# EAGLE board eagleBoard (EAGLE 7.5.0)
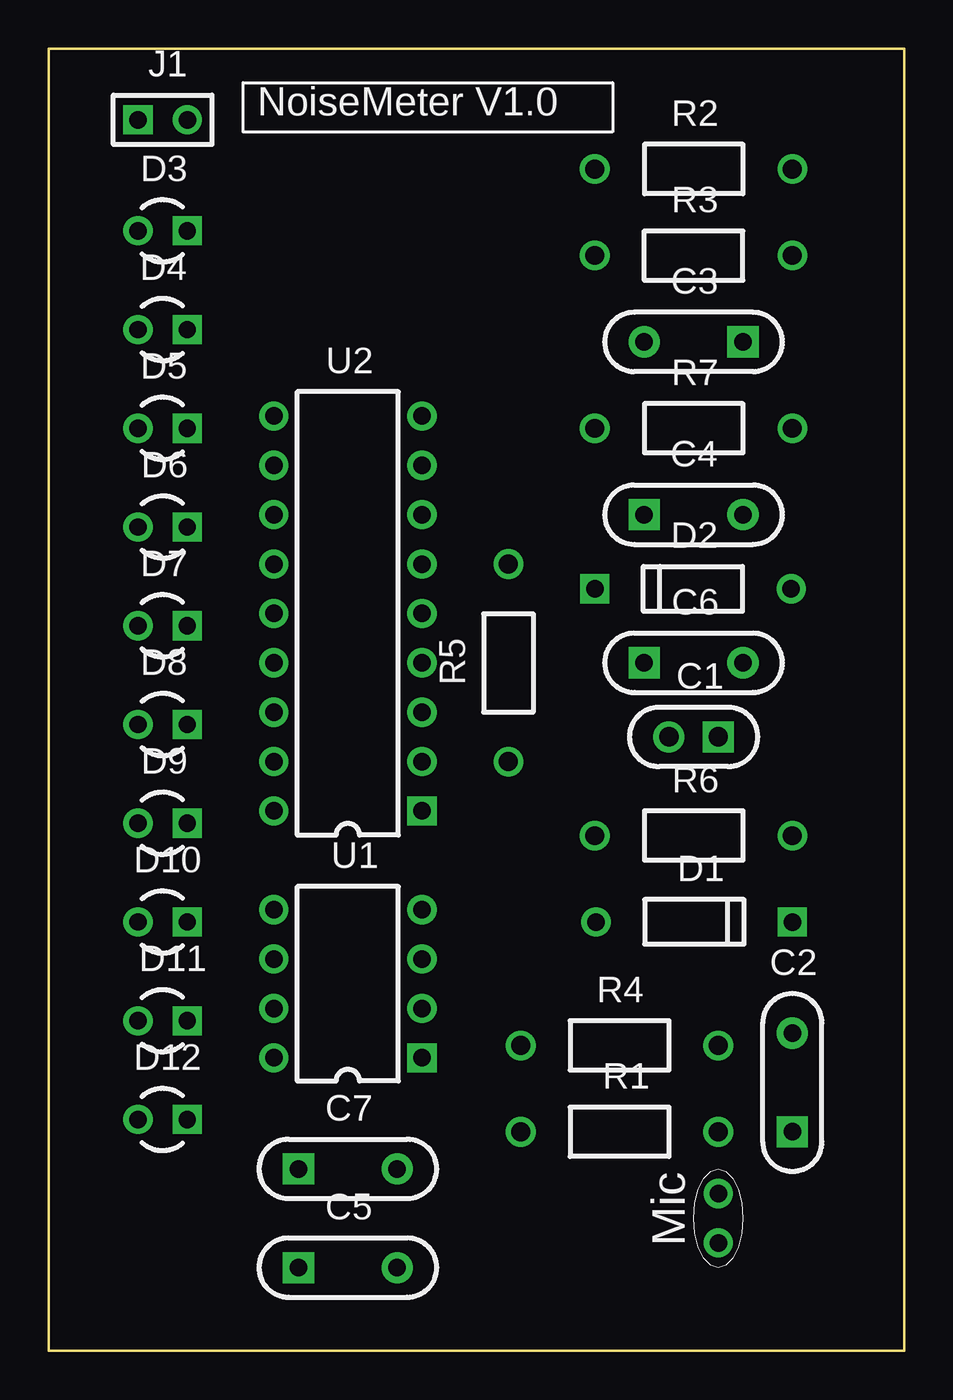
[diagram p0: board, top side]
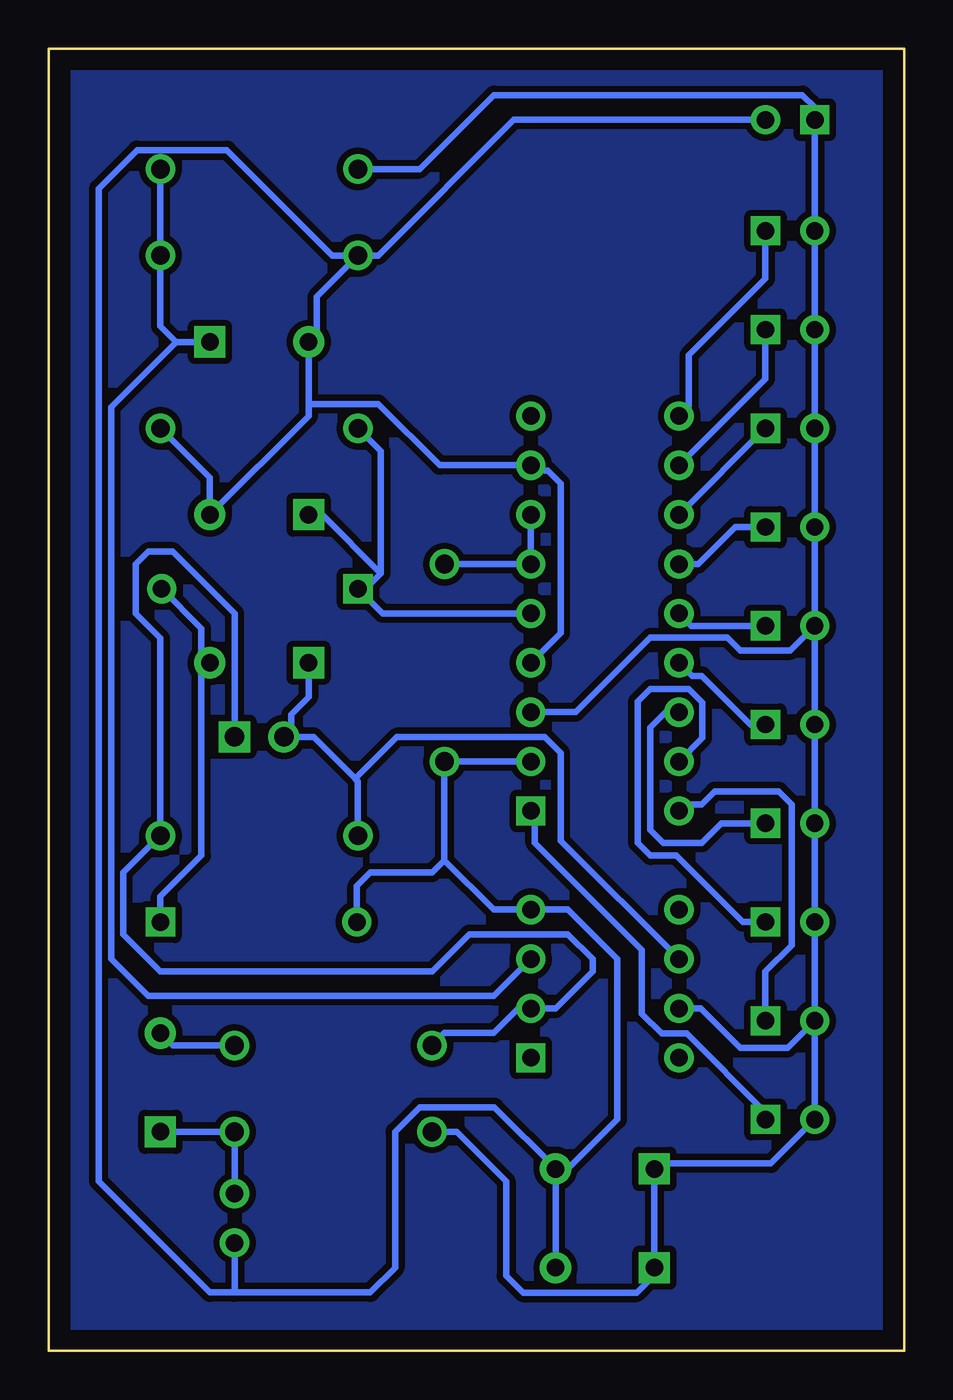
[diagram p1: board, bottom side, seen from below]

Size 44 x 67 mm. Coordinates in mm from the lower left corner, seen from the top.
Outline: 0,67 44,67 44,0 0,0 0,67
Copper layers (1*16): Top 0.035mm / dielectric 1.5mm / Bottom 0.035mm
Design rules "default *": minimum track width 10mil, minimum drill 0.61mm, track to track 8mil, track to pad 8mil, pad to pad 8mil, via to via 8mil, smd to smd 8mil, copper to edge 40mil, drill to drill 8mil, minimum pad ring 0mil, minimum via ring 8mil, stop-mask expansion 4mil, vias tented up to drill 19mil, thermal gap 10mil
Net classes: 0 Default: width 0.33 mm, clearance 0.33 mm, clearance 0.33 mm to class 1, clearance 0.33 mm to class 2, clearance 0.33 mm to class 3, clearance 0.33 mm to class 4; 1 PowerRail: width 0.33 mm, clearance 0.33 mm, clearance 0.33 mm to class 0, clearance 0.33 mm to class 2, clearance 0.33 mm to class 3, clearance 0.33 mm to class 4; 2 Signals: width 0.33 mm, clearance 0.33 mm, clearance 0.33 mm to class 0, clearance 0.33 mm to class 1, clearance 0.33 mm to class 3, clearance 0.33 mm to class 4; 3 Amplifier_connections: width 0.33 mm, clearance 0.33 mm, clearance 0.33 mm to class 0, clearance 0.33 mm to class 1, clearance 0.33 mm to class 2, clearance 0.33 mm to class 4; 4 Display: width 0.33 mm, clearance 0.33 mm, clearance 0.33 mm to class 0, clearance 0.33 mm to class 1, clearance 0.33 mm to class 2, clearance 0.33 mm to class 3

## Footprints (pad centres in the part's own frame; a part is rotated, then mirrored left to right if it is on the bottom)
CAP-2.54/6.6x3 = drill 1 pad 1.6 square: 1 -1.27,0 | drill 1 pad 1.6: 2 1.27,0
CAP-5.08/9.15x3 = drill 0.9 pad 1.6 square: 1 -2.54,0 | drill 0.9 pad 1.6: 2 2.54,0
CAP-5.08/9.15x3_C3 = drill 0.9 pad 1.6 square: 1 -2.54,0 | drill 0.9 pad 1.6: 2 2.54,0
DO-35 = drill 0.9 pad 1.5 square: 1 -5.05,0 | drill 0.9 pad 1.5: 2 5.05,0
LED-3R_White = drill 0.889 pad 1.5 square: 1 -1.27,0 | drill 0.889 pad 1.5: 2 1.27,0
HDR-1x2 = drill 0.9 pad 1.5 square: 1 -1.27,0 | drill 0.9 pad 1.5: 2 1.27,0
Pad = drill 0.9 pad 1.5: 1 0,0
RES-10.16/5.1x2.5 = drill 0.965 pad 1.524: 1 -5.08,0; 2 5.08,0
RES-10.16/5.1x2.5_R5 = drill 0.965 pad 1.524: 1 -5.08,0; 2 5.08,0
DIP-8 = drill 0.9 pad 1.5 square: 1 -3.81,3.81 | drill 0.9 pad 1.5: 2 -3.81,1.27; 3 -3.81,-1.27; 4 -3.81,-3.81; 5 3.81,-3.81; 6 3.81,-1.27; 7 3.81,1.27; 8 3.81,3.81
DIP-18 = drill 0.9 pad 1.5 square: 1 -3.81,10.16 | drill 0.9 pad 1.5: 2 -3.81,7.62; 3 -3.81,5.08; 4 -3.81,2.54; 5 -3.81,0; 6 -3.81,-2.54; 7 -3.81,-5.08; 8 -3.81,-7.62; 9 -3.81,-10.16; 10 3.81,-10.16; 11 3.81,-7.62; 12 3.81,-5.08; 13 3.81,-2.54; 14 3.81,0; 15 3.81,2.54; 16 3.81,5.08; 17 3.81,7.62; 18 3.81,10.16

## Placement (x,y rotation side)
C1  22pF  [CAP-2.54/6.6x3]  33.17,31.59 180 top
C2  10uF  [CAP-5.08/9.15x3]  38.25,13.81 90 top
C3  10uF  [CAP-5.08/9.15x3_C3]  33.17,51.91 180 top
C4  10uF  [CAP-5.08/9.15x3_C3]  33.17,43.02 0 top
C5  100uF  [CAP-5.08/9.15x3_C3]  15.39,4.29 0 top
C6  100uF  [CAP-5.08/9.15x3_C3]  33.17,35.4 0 top
C7  100nF  [CAP-5.08/9.15x3_C3]  15.39,9.37 0 top
D1  DIODE_1N4148  [DO-35]  33.2,22.07 180 top
D2  DIODE_1N4148  [DO-35]  33.14,39.21 0 top
D3  3mm Round  [LED-3R_White]  5.86,57.62 180 top
D4  3mm Round  [LED-3R_White]  5.86,52.55 180 top
D5  3mm Round  [LED-3R_White]  5.86,47.47 180 top
D6  3mm Round  [LED-3R_White]  5.86,42.39 180 top
D7  3mm Round  [LED-3R_White]  5.86,37.3 180 top
D8  3mm Round  [LED-3R_White]  5.86,32.23 180 top
D9  3mm Round  [LED-3R_White]  5.86,27.14 180 top
D10  3mm Round  [LED-3R_White]  5.86,22.07 180 top
D11  3mm Round  [LED-3R_White]  5.86,16.98 180 top
D12  3mm Round  [LED-3R_White]  5.86,11.91 180 top
J1  HDR-1X2  [HDR-1x2]  5.86,63.34 0 top
Pad1  PAD  [Pad]  34.44,8.1 0 top
Pad2  PAD  [Pad]  34.44,5.55 0 top
R1  1k  [RES-10.16/5.1x2.5]  29.36,11.27 180 top
R2  1k  [RES-10.16/5.1x2.5]  33.17,60.8 180 top
R3  1k  [RES-10.16/5.1x2.5]  33.17,56.36 0 top
R4  1k  [RES-10.16/5.1x2.5]  29.36,15.71 180 top
R5  1k  [RES-10.16/5.1x2.5_R5]  23.64,35.4 270 top
R6  1M  [RES-10.16/5.1x2.5]  33.17,26.51 180 top
R7  10k  [RES-10.16/5.1x2.5]  33.17,47.47 180 top
U1  ICL7611ACPA  [DIP-8]  15.39,18.89 180 top
U2  LM3914N  [DIP-18]  15.39,37.94 180 top

## Library data of the parts
C1-C7 D1 D2 J1 Pad1 Pad2 R1-R7 = common
D3-D12 = common; DATASHEET: http://datasheets.diptrace.com/sensors_led/WP7104QWC-D.pdf; MANUFACTURER: Kingbright
U1 = common; DATASHEET: http://datasheets.diptrace.com/maxim/ICL7611-ICL764X.pdf; MANUFACTURER: Maxim
U2 = common; MANUFACTURER: National Semiconductor

## Nets
Feedback_Amp [Amplifier_connections]: C1.1 R4.2 R6.1 U1.2
Gnd [PowerRail]: C3.2 C4.2 C5.2 C7.2 D1.2 J1.2 Pad2.1 R3.1 R5.2 R7.1 U1.4 U2.2 U2.4 U2.8
InputToDisplay [Signals]: C4.1 D2.1 R7.2 U2.5
Net_0: C6.2 D1.1 D2.2
Net_1 [Display]: D3.1 U2.10
Net_2 [Display]: D4.1 U2.11
Net_3 [Display]: D5.1 U2.12
Net_4 [Display]: D6.1 U2.13
Net_5 [Display]: D7.1 U2.14
Net_6 [Display]: D8.1 U2.15
Net_7 [Display]: D9.1 U2.16
Net_8 [Display]: D10.1 U2.17
Net_9 [Display]: D11.1 U2.18
Net_10 [Display]: D12.1 U2.1
Net_12: R5.1 U2.6 U2.7
Net_15: C2.2 R4.1
NonInvertingInput_Amp [Amplifier_connections]: C3.1 R2.1 R3.2 U1.3
SignalFromAmplifier [Signals]: C1.2 C6.1 R6.2 U1.6
SignalFromMic [Signals]: C2.1 Pad1.1 R1.1
Vcc [PowerRail]: C5.1 C7.1 D3.2 D4.2 D5.2 D6.2 D7.2 D8.2 D9.2 D10.2 D11.2 D12.2 J1.1 R1.2 R2.2 U1.7 U2.3

## Tracks (layer width: path | path; a pad name or v marks a point on that pad's centre or on a via)
Feedback_Amp
  Bottom 0.33: R4.2 23.64,16.35 21.1,16.35 19.84,17.62 U1.2 17.93,17.62 16.02,19.52 16.02,20.16 17.3,21.43 22.38,21.43 24.28,19.52 38.25,19.52 40.16,21.43 40.16,24.61 R6.1 38.25,36.67 39.52,37.94 39.52,40.48 38.88,41.12 37.62,41.12 34.44,37.94 C1.1
Gnd
  Bottom 0.33: 30.63,48.72 30.63,48.1 C4.2 35.71,44.93 R7.1 | 30.63,48.72 | 30.63,48.72 C3.2 30.21,52.33 30.21,54.24 R3.1 | 17.93,9.39 C7.2 C5.2 | 17.93,9.39 21.08,12.54 24.91,12.54 26.18,11.27 26.18,4.29 27.45,3.02 34.44,3.02 | 34.44,3.02 35.71,3.02 41.42,8.73 41.42,59.8 39.45,61.78 34.83,61.78 29.4,56.36 R3.1 | 17.93,9.39 17.27,9.39 14.75,11.91 14.75,20.16 17.3,22.7 U1.4 21.1,22.7 23.64,25.24 | D1.2 28.15,23.91 27.45,24.61 24.28,24.61 23.64,25.24 | R5.2 23.64,25.24 | U2.2 R5.2 | R5.2 | 30.63,48.72 27.05,48.72 23.89,45.56 U2.8 18.92,45.28 18.33,45.28 17.67,44.62 17.67,36.93 U2.4 | J1.2 20.07,63.34 27.05,56.36 R3.1 | Pad2.1 34.44,3.02
InputToDisplay
  Bottom 0.33: R7.2 26.91,46.28 26.91,40 | 26.91,40 27.7,39.21 D2.1 26.82,37.94 U2.5 | 26.91,40 29.93,43.02 C4.1
N$1
  pour Bottom (isolate 0.33, no thermals): 1.32,65.68 42.68,65.68 42.68,1.32 1.32,1.32
Net_0
  Bottom 0.33: D2.2 36.15,37.17 36.15,35.84 C6.2 36.15,34.96 36.15,25.48 38.25,23.38 D1.1
Net_1
  Bottom 0.33: D3.1 7.13,55.16 11.07,51.22 11.07,48.61 U2.10
Net_2
  Bottom 0.33: D4.1 7.13,50.01 U2.11
Net_3
  Bottom 0.33: D5.1 U2.12 | U2.12
Net_4
  Bottom 0.33: D6.1 8.68,42.39 10.59,40.48 U2.13
Net_5
  Bottom 0.33: D7.1 10.95,37.3 U2.14
Net_6
  Bottom 0.33: D8.1 7.91,32.23 10.41,34.72 10.9,34.72 U2.15
Net_7
  Bottom 0.33: D9.1 9.41,27.14 10.41,26.14 12.39,26.14 13.05,26.8 13.05,32.08 12.27,32.86 U2.16
Net_8
  Bottom 0.33: D10.1 8.31,22.07 11.73,25.48 13.05,25.48 13.71,26.14 13.71,33.4 13.05,34.06 11.07,34.06 10.37,33.37 10.37,31.53 U2.17
Net_9
  Bottom 0.33: D11.1 7.13,19.52 5.79,20.86 5.79,28.12 6.45,28.78 9.75,28.78 10.41,28.12 11.24,28.12 U2.18
Net_10
  Bottom 0.33: D12.1 7.13,12.27 11.19,16.32 12.47,16.32 13.48,17.34 13.48,20.64 18.99,26.14 18.99,27.57 U2.1
Net_12
  Bottom 0.33: R5.1 U2.6 U2.7 | R5.1
Net_15
  Bottom 0.33: R4.1 37.62,15.71 C2.2
NonInvertingInput_Amp
  Bottom 0.33: U1.3 21.1,18.25 38.88,18.25 40.79,20.16 40.79,48.56 37.44,51.91 | 37.44,51.91 C3.1 | 37.44,51.91 38.25,52.72 R3.2 R2.1
SignalFromAmplifier
  Bottom 0.33: C6.1 30.63,33.64 31.53,32.74 31.53,31.96 C1.2 30.38,31.59 28.23,29.44 | R6.2 28.09,29.3 28.23,29.44 | U1.6 17.67,26.25 17.67,30.76 18.48,31.58 26.09,31.58 28.23,29.44
SignalFromMic
  Bottom 0.33: R1.1 C2.1 | C2.1 | Pad1.1 R1.1 | R1.1
Vcc
  Bottom 0.33: D7.2 D6.2 D5.2 D4.2 D3.2 J1.1 4.59,63.98 5.23,64.61 21.1,64.61 24.91,60.8 R2.2 | U2.3 16.89,32.86 13.05,36.7 9.09,36.7 8.43,36.04 5.86,36.04 D7.2 | D11.2 D12.2 6.86,9.64 12.57,9.64 C7.1 C5.1 12.85,3.9 13.76,2.99 19.6,2.99 20.47,3.86 20.47,8.73 23.01,11.27 R1.2 | D11.2 D10.2 D9.2 D8.2 D7.2 | U1.7 10.47,17.62 8.43,15.58 6,15.58 D11.2

## Text on the board
tPlace: NoiseMeter V1.0 | Mic